# Altium PCB BaseBoard - 副本.PcbDoc
Units mil, origin at the board's own origin, x right, y up, seen from the top; angles counter-clockwise.
Board outline 6000 x 4000 mil, 2 copper layers (Top Layer, Bottom Layer); 17 components, 12 nets, 68 pads, 26 vias.
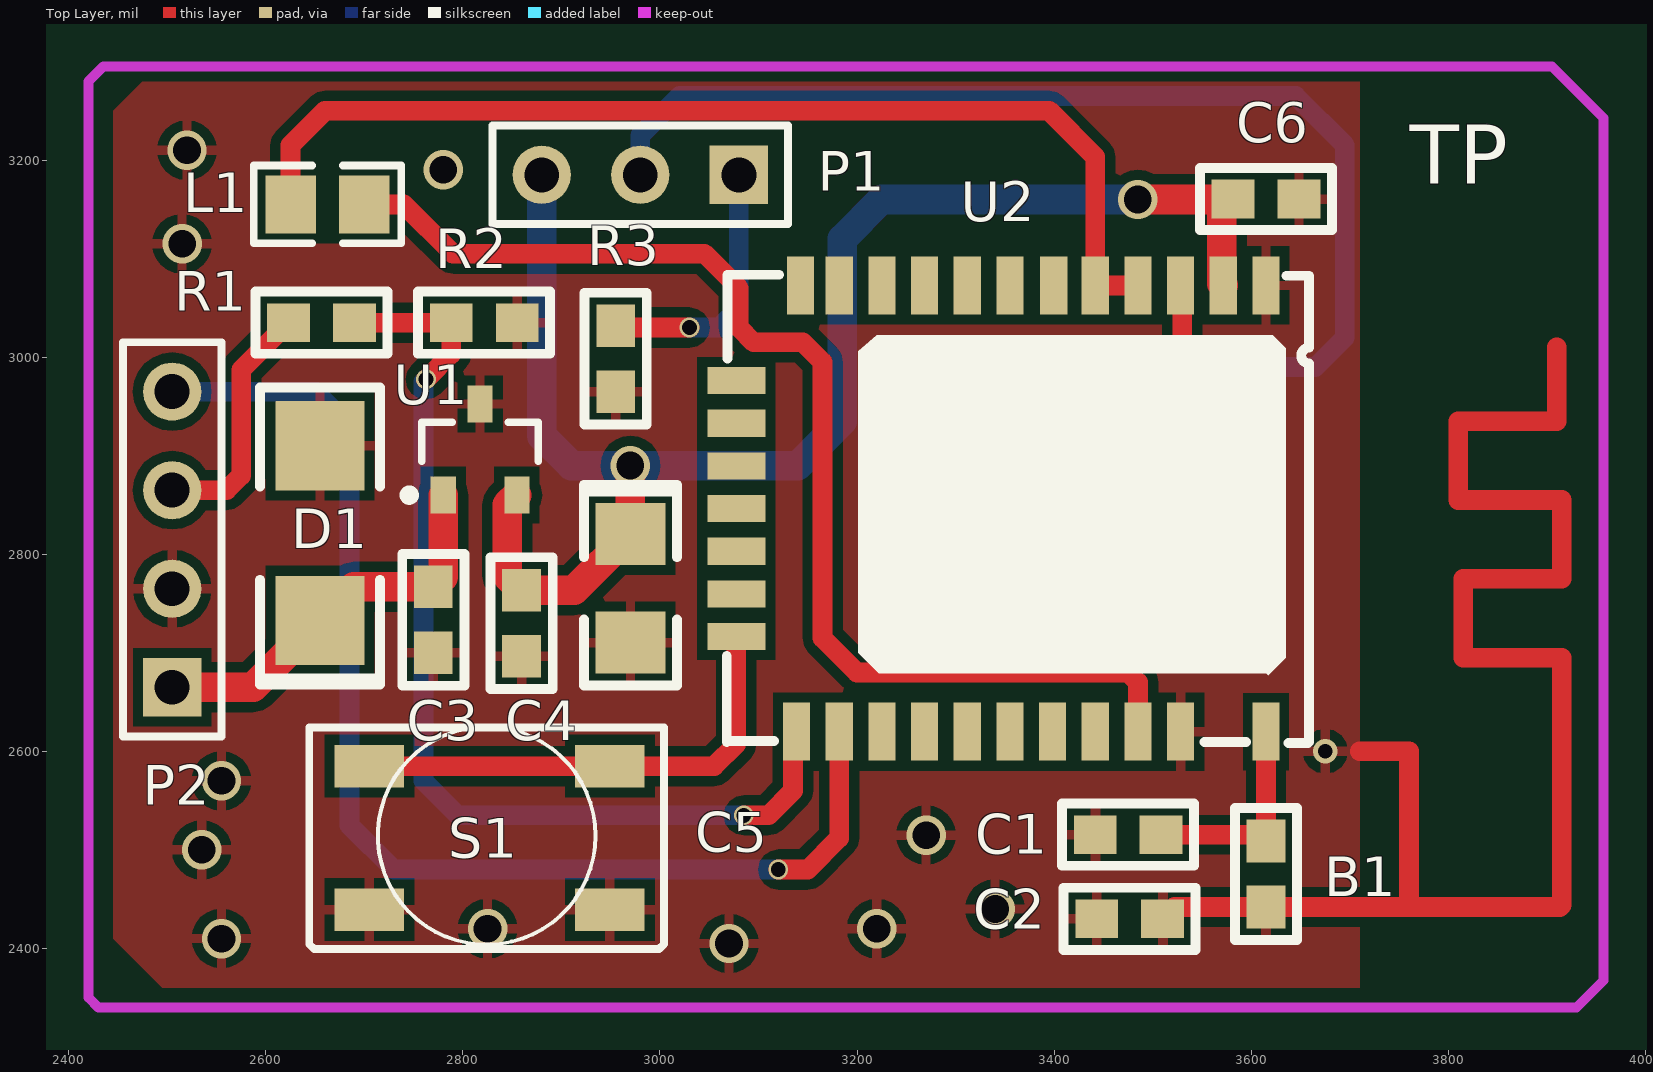
[diagram p0: Top Layer view]
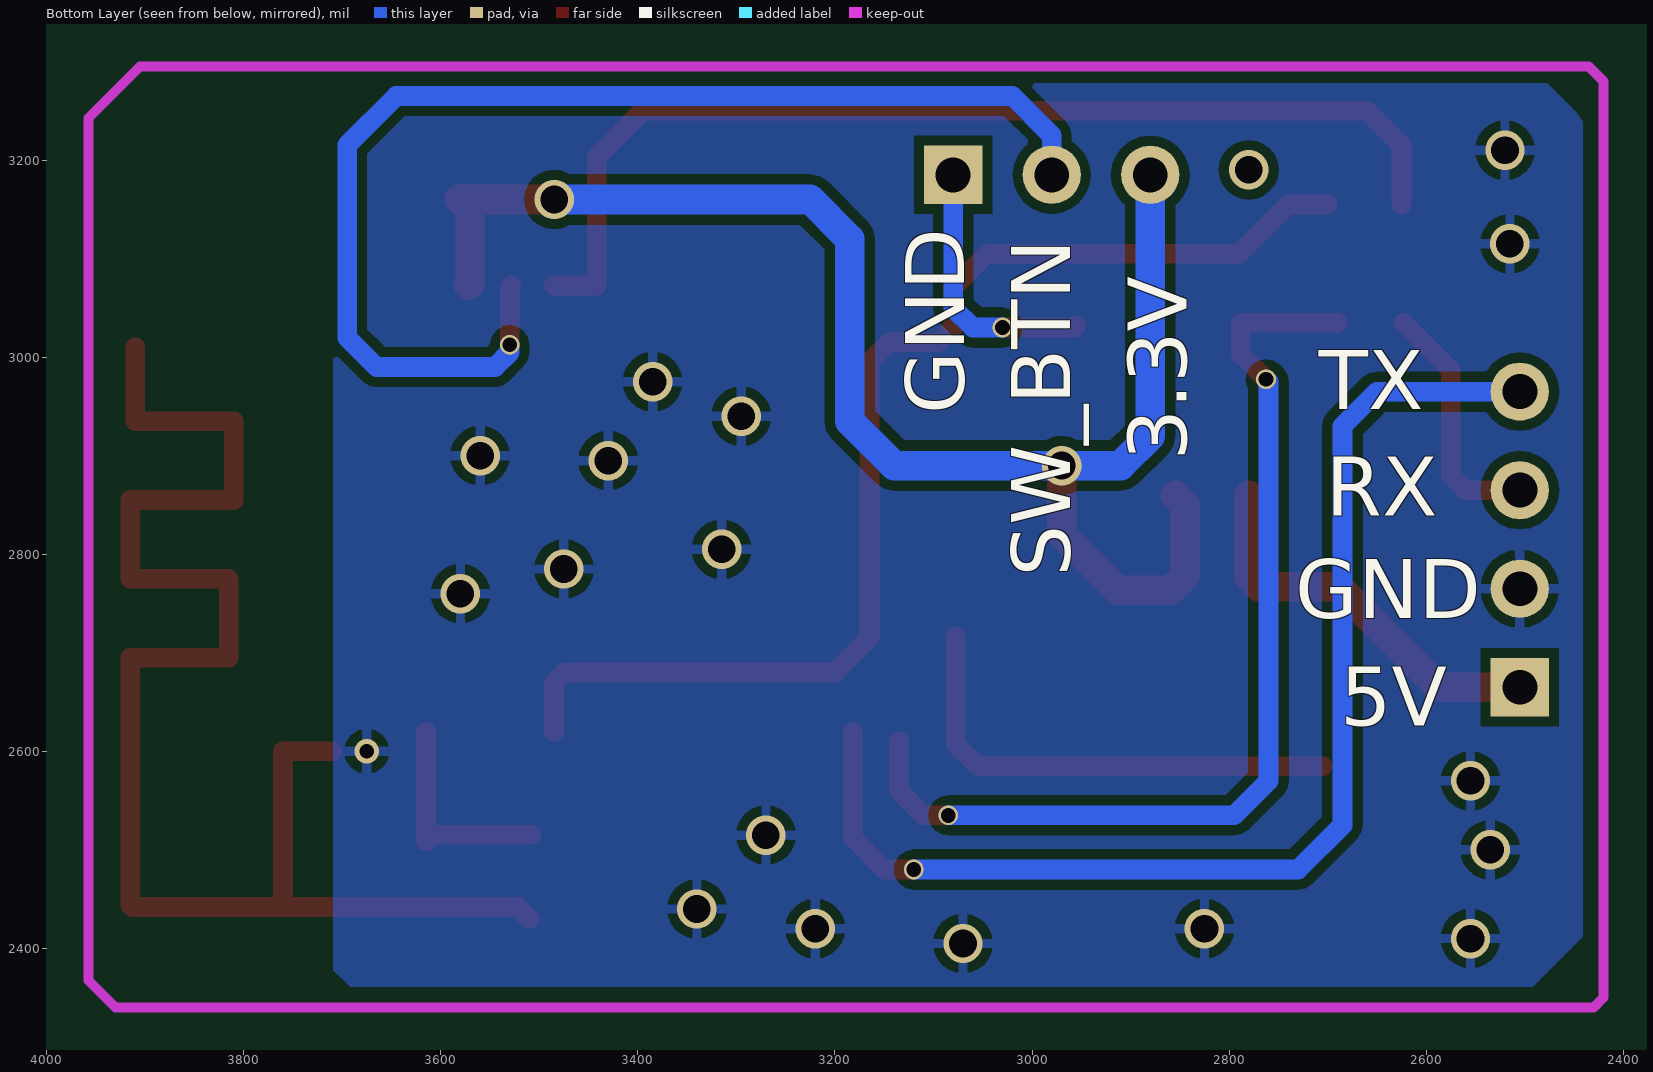
[diagram p1: Bottom Layer view, seen from below]

## Layer stack, top to bottom
Top Solder: solder mask 0.4, Solder Resist, Dk 3.5
Top Layer: signal copper 1.4
Dielectric 1: dielectric 12.6, FR-4, Dk 4.8
Bottom Layer: signal copper 1.4
Bottom Solder: solder mask 0.4, Solder Resist, Dk 3.5

## Board outline
1000,1000 7000,1000 7000,5000 1000,5000

## Design rules (kind name [scope] priority, off if disabled: settings)
Clearance [All] p1: gap=10
PolygonConnect [All] p1: connectstyle=Relief reliefconductorwidth=10 reliefentries=4 polygonreliefangle="90 Angle" airgapwidth=10
RoutingVias [All] p1: holewidth=15 width=20 viastyle="Through Hole" minholewidth=15 minwidth=20 maxholewidth=28 maxwidth=40
SolderMaskExpansion [All] p1: expansion=4
Width [All] p1: maxlimit=40 minlimit=10 preferedwidth=20
30 further rules are at their usual default settings.

## Components (designator, comment, footprint, x,y, rotation, side; value= is the part's Value field where it differs from the comment)
B1 "1nh" 0603 3614.53,2475.47 r270 top
C1 "15pf" 0603 3475,2515 r0 top
C2 "15pF" 0603 3476.54,2429.61 r0 top
C3 "1uF" 0603 2770.39,2733.46 r90 top
C4 "1uF" 0603 2860,2730 r90 top
C5 "10uF/16V" 1206 2970,2765 r270 top
C6 "0.1uF" 0603 3615,3160 r0 top
D1 "Schottky" DO214-AC 2655,2821.42 r270 top
L1 "LED" 0805 2662.6,3155 r0 top
P1 "HC-SR501" Header3 2980,3095.63 r180 top
P2 "Header 4" HDR1X4 2505,2665 r90 top
R1 "2.2K" 0603 2656.54,3034.61 r0 top
R2 "4.7K" 0603 2821.54,3035.39 r180 top
R3 "2.2K" 0603 2955.39,2998.46 r90 top
S1 "Button" BUtton-T4 2949.09,2439.33 r180 top
U1 "AP7313" AP7313-33SAG-7 2817.4,2906.26 r90 top
U2 "BM78SPP05NC2" BM78SPP05NC2 3067.68,3082.6 r270 top

## Footprints (in the part's own frame and the unit in brackets; to place one, negate y for a bottom-side part, rotate by r counter-clockwise, add the part's x,y. Pads: shape width x height; smd on the part's side, far side on the other; paste and mask are expansions set on the pad)
0603 [mm]
  rect 1.1x1 smd: 1(-0.85,0.01) 2(0.85,0.01)
  silkscreen extent -1.7,-0.79 1.7,0.81
0805 [mm]
  rect 1.3x1.5 smd: 1(-0.95,0) 2(0.95,0)
  silkscreen extent -1.9,-1 1.9,1
1206 [mm]
  rect 1.6x1.8 smd: 1(-1.41,0) 2(1.39,0)
  silkscreen extent -2.68,-1.2 2.49,1.2
AP7313-33SAG-7 [mm] "SOT23, 3-Leads, Body 2.90x2.40mm, Pitch 0.95mm, IPC Medium Density"
  rect 0.95x0.65 smd: 1(-1.175,0.95) 2(-1.175,-0.95) 3(1.175,0)
  silkscreen extent -1.3,-1.5 0.7,1.95
BM78SPP05NC2 [mm]
  rect 1.5x0.7 smd: 1(0.25,13.9) 2(0.25,12.8) 3(0.25,11.7) 4(0.25,10.6) 5(0.25,9.5) 6(0.25,8.43) 7(0.25,7.3) 8(0.25,6.2) 9(0.25,5.1) 10(0.25,4) 11(0.25,2.9) 12(0.25,1.9) 20(11.75,1.8) 21(11.75,2.9) 22(11.75,4) 23(11.75,5.1) 24(11.75,6.2) 25(11.75,7.3) 26(11.75,8.4) 27(11.75,9.5) 28(11.75,10.6) 29(11.75,11.7) 30(11.75,13.9)
  rect 0.7x1.5 smd: 13(2.7,0.25) 14(3.8,0.25) 15(4.9,0.25) 16(6,0.25) 17(7.1,0.25) 18(8.2,0.25) 19(9.3,0.25)
  silkscreen extent -0.03,0 12.04,15.01
BUtton-T4 [mm] "4*4*1.5"
  rect 1.8x1.1 smd: 1(0,0) 1(6.2,0) 2(0,-3.7) 2(6.2,-3.7)
  silkscreen extent -1.4,-4.71 7.75,1.02
DO214-AC [mm]
  rect 2.3x2.3 smd: 1(-2.25,0) 2(2.25,0)
  silkscreen extent -3.75,-1.55 3.9,1.55
HDR1X4 [mm] "Connector; Header; 4 Position"
  rect 1.5x1.5 hole 0.9: 1(0,0)
  round 1.5 hole 0.9: 2(2.54,0) 3(5.08,0) 4(7.62,0)
  silkscreen extent -1.27,-1.27 8.89,1.27
Header3 [mm]
  rect 1.5x1.5 hole 0.9: 1(-2.54,-2.27)
  round 1.5 hole 0.9: 2(0,-2.27) 3(2.54,-2.27)
  silkscreen extent -3.81,-3.54 3.81,-1

## Part data
B1: library part Bead
C1 C2 C3 C4 C6: library part Cap1, "ceramic"
C5: library part Cap3, "aluminum"
D1: library part B340A-13-F
P1: library part "Header 3", "Header, 3-Pin"
P2: "Header, 4-Pin"
R1 R2 R3: library part Res
U1: library part AP7313-33SAG-7

## Via types
v1: diameter 40, hole 28, Top Layer to Bottom Layer, 20 vias
v2: diameter 20, hole 15, Top Layer to Bottom Layer, 5 vias
v3: diameter 25, hole 15, Top Layer to Bottom Layer, 1 vias

## Nets (pads, with @x,y where several pads share a name; then routed paths per layer and width w, separated by ;. In a path a pad name is that pad's centre, name@x,y a point inside that pad or via, vN(x,y) a via of type N, cw(c..) or ccw(c..) an arc to the next point about the centre after c; other vN are vias at no path point)
3.3V: C4.2 C5.1 C6.1 P1.3 U1.2 U2.2 | length 1602
  Top Layer w30: U1.2 2845,2850.2 2845,2778.07 C4.2 2912.95,2763.46 C5.1 v1(2970,2890) ; v1(3485,3160) C6.1@3581.14,3160 ; U2.2 3570,3074.37 3570,3148.86 C6.1@3581.14,3160 ; C6.1 C6.1@3581.14,3160
  Bottom Layer w30: P1.3 2880,2920 2910,2890 v1(2970,2890) 3140,2890 3185,2935 3185,3120 3225,3160 v1(3485,3160)
5V: C3.2 D1.2 P2.1 U1.1 | length 404.4
  Top Layer w30: P2.1 2587.16,2665 D1.2 2689.09,2766.93 C3.2 2780,2776.93 U1.1
ANT: B1.2 C1.1 C2.1 C2.2 C3.1 C4.1 C5.2 C6.2 D1.1 P2.2 R2.1 R3.1 S1.1 U1.3 U2.1 U2.29 | length 1589.8
  Top Layer w20: C2.2 3522.01,2442.01 B1.2 3760,2442.01 ; 3710,2600 3760,2600 3760,2442.01 ; 3910,3010 3910,2935 3810,2935 3810,2855 3915,2855 3915,2775 3815,2775 3815,2695 3915,2695 3915,2444.02 3912.99,2442.01 3760,2442.01
  other v1: 3070,2405 2555,2410 2825,2420 3220,2420 3340,2440 2535,2500 3270,2515 2555,2570 3580,2760 3475,2785 3315,2805 3430,2895 3560,2900 3295,2940 3385,2975 2515,3115 2520,3210
  other v3: 3675,2600
LDO33_O: L1.1 U2.4 U2.5 | length 1084.6
  Top Layer w20: L1.1 2625,3155 2625,3215 2660,3250 3395,3250 3441.69,3203.31 U2.5 U2.4
LED1: L1.2 U2.28 | length 1223.3
  Top Layer w20: L1.2 2740,3155 2790,3105 3045,3105 3080,3070 3080,3030 3095,3015 3145,3015 3165,2995 3165,2715 3200,2680 3475,2680 3485,2670 U2.28
NetB1_1: B1.1 C1.2 U2.30 | length 220.2
  Top Layer w20: C1.2 3608.46,2515.39 B1.1 U2.30
NetP1_1: P1.1 R3.2 | length 269.1
  Top Layer w20: R3.2 2956.93,3030 v2(3030,3030)
  Bottom Layer w20: v2(3030,3030) 3060,3030 3080,3050 P1.1
NetR1_2: R1.2 R2.2 U2.20 | length 1024.6
  Top Layer w20: R1.2 R2.2 2788.07,3003.07 v2(2762.5,2977.5) ; v2(3085,2535) 3110,2535 3135,2560 U2.20@3135,2610
  Bottom Layer w20: v2(2762.5,2977.5) 2760,2975 2760,2570 2795,2535 v2(3085,2535)
NetS1_2: S1.2 U2.19 | length 490.8
  Top Layer w20: S1.2@2705,2585 2949.09,2585 3055,2585 3077.52,2607.52 U2.19
RX: P2.3 R1.1 | length 251.1
  Top Layer w20: P2.3 2560,2865 2575,2880 2575,2986.93 R1.1
SW_BTN: P1.2 U2.3 | length 1239.4
  Top Layer w20: U2.3 3530,3071.06 v2(3530,3012.5)
  Bottom Layer w20: P1.2 2980,3225 3020,3265 3645,3265 3695,3215 3695,3020 3665,2990 3545,2990 3530,3005 v2(3530,3012.5)
TX: P2.4 U2.21 | length 1236.3
  Top Layer w20: v2(3120,2480) 3150,2480 3181.85,2511.85 U2.21
  Bottom Layer w20: P2.4 2650,2965 2685,2930 2685,2525 2730,2480 v2(3120,2480)
pads on no net: U2.6 U2.7 U2.8 U2.9 U2.10 U2.11 U2.12 U2.13 U2.14 U2.15 U2.16 U2.17 U2.18 U2.22 U2.23 U2.24 U2.25 U2.26 U2.27
copper on no net:
  other v1: 2780,3190

## Polygon pours and split planes (outlines as drawn)
ANT on Top Layer "GND" (solid, remove dead copper, pour order 0): 2445,3250 2475,3280 3710,3280 3710,3175 3710,3085 3710,2400 3710,2380 3710,2360 2505,2360 2495,2360 2445,2410 2445,2750
ANT on Bottom Layer "GND" (solid, remove dead copper, pour order 2): 2447,3248 2477,3278 3701,3278 3709,3270 3709,2381 3709,2378 3692,2361 2492,2361 2443,2410 2441,2412 2441,3226 2441,3239

## Keep-outs
Keep-Out Layer:
  lines w10: 2420,2350 2430,2340 3930,2340 3957.5,2367.5 3957.5,2937.5 3957.5,3242.5 3935,3265 3905,3295 2435,3295 2420,3280 2420,3053.75 2420,2581.25 2420,2350

## Silkscreen, mask and mechanical layers (free items; w line width, h text height)
Top Overlay:
  region: 3201,3006 3220,3022 3223,3022 3622,3022 3635,3009 3635,2695 3617,2677 3615,2679 3222,2679 3201,2700
  text "TP" at 3761,3176 h60
Bottom Overlay:
  text "TX" at 2709,2947 h60
  text "GND" at 3069,2942 h60 r270
  text "3.3V" at 2843,2895 h60 r270
  text "RX" at 2702,2839 h60
  text "SW_BTN" at 2961,2777 h60 r270
  text "GND" at 2733,2735 h60
  text "5V" at 2687,2626 h60
Top Paste:
  lines w19.68: 3619,2442 3776,2442 3911,2442 3915,2446 3915,2696 3914,2695 3815,2695 3815,2775 3915,2775 3915,2855 3811,2855 3810,2856 3810,2935 3910,2935 3910,3010
  lines w23.62: 3721,2601 3759,2601 3760,2600 3760,2442
Top Solder:
  lines w23.62: 3615,2443 3914,2443 3915,2444 3915,2696 3914,2695 3816,2695 3815,2696 3815,2776 3916,2776 3915,2777 3915,2855 3913,2857 3809,2857 3810,2858 3810,2935 3912,2935 3910,2937 3910,3009 ; 3720,2601 3759,2601 3760,2600 3760,2452